# Altium PCB C8T6_V2.0.PcbDoc
Units mil, origin at the board's own origin, x right, y up, seen from the top; angles counter-clockwise.
Board outline 2203.03 x 1475 mil, 2 copper layers (Top Layer, Bottom Layer); 36 components, 53 nets, 188 pads, 139 vias.
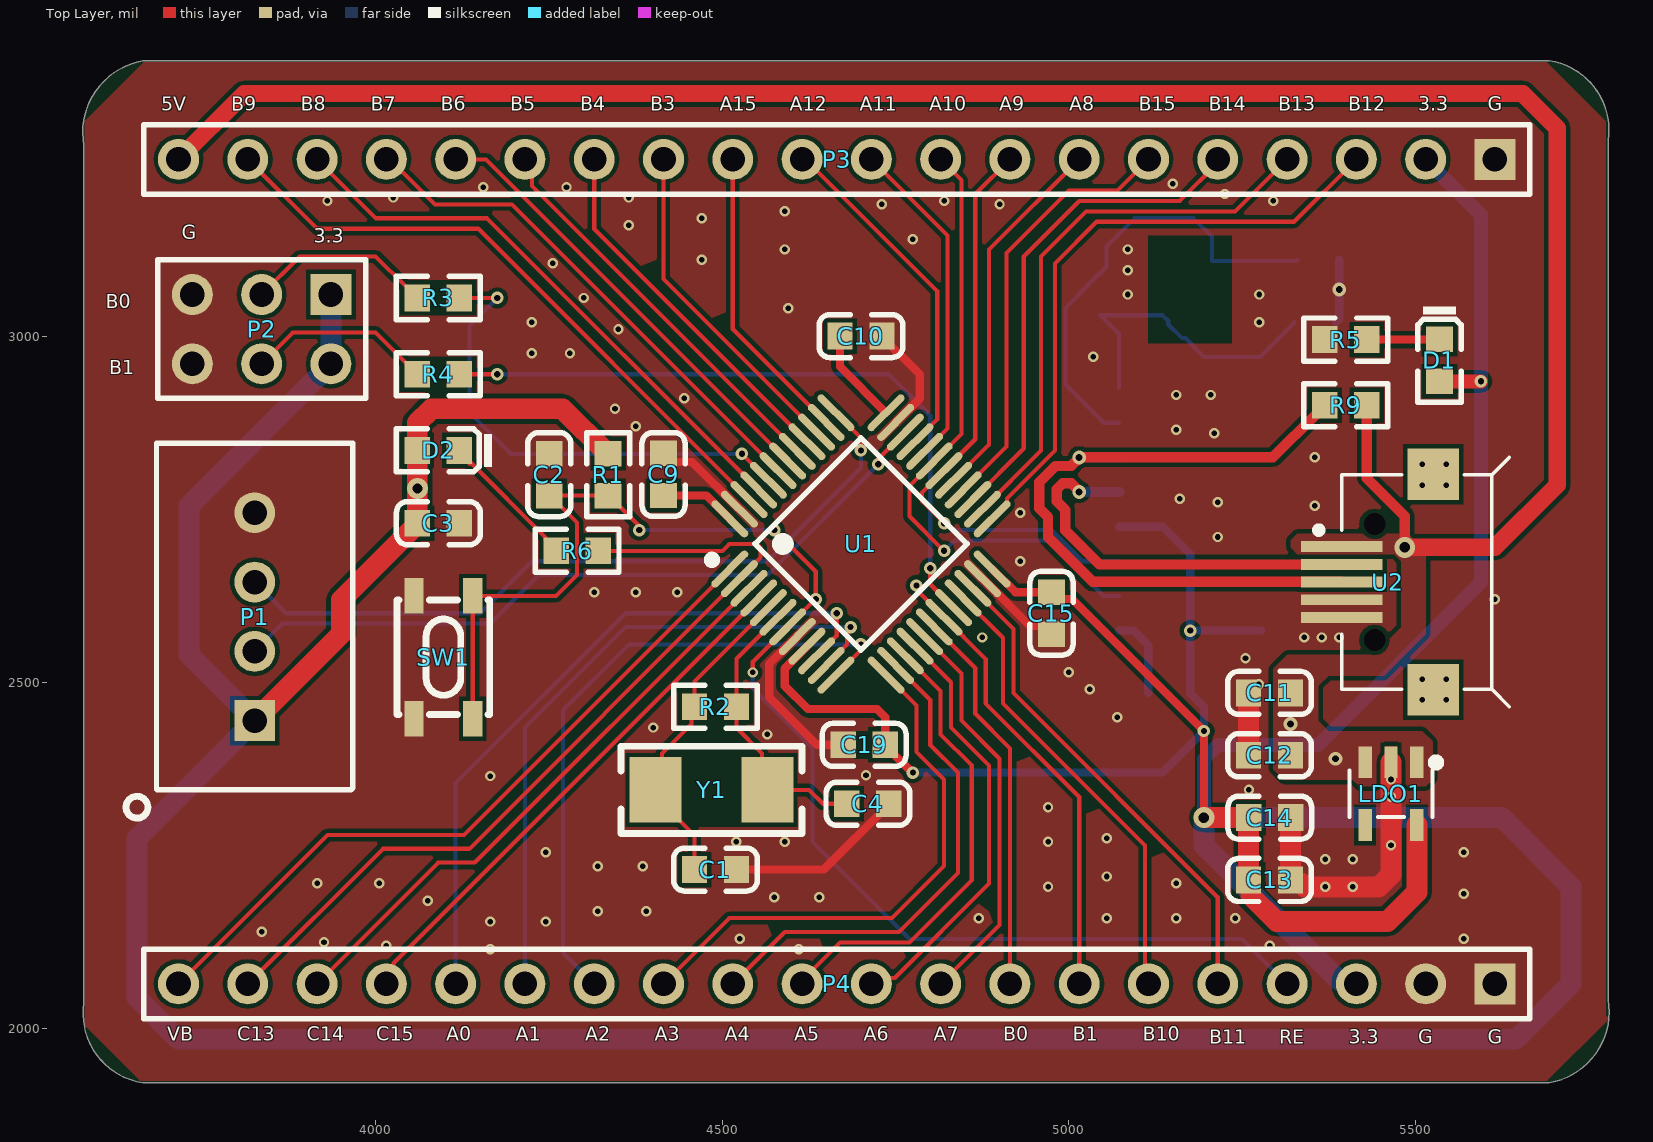
[diagram p0: Top Layer view]
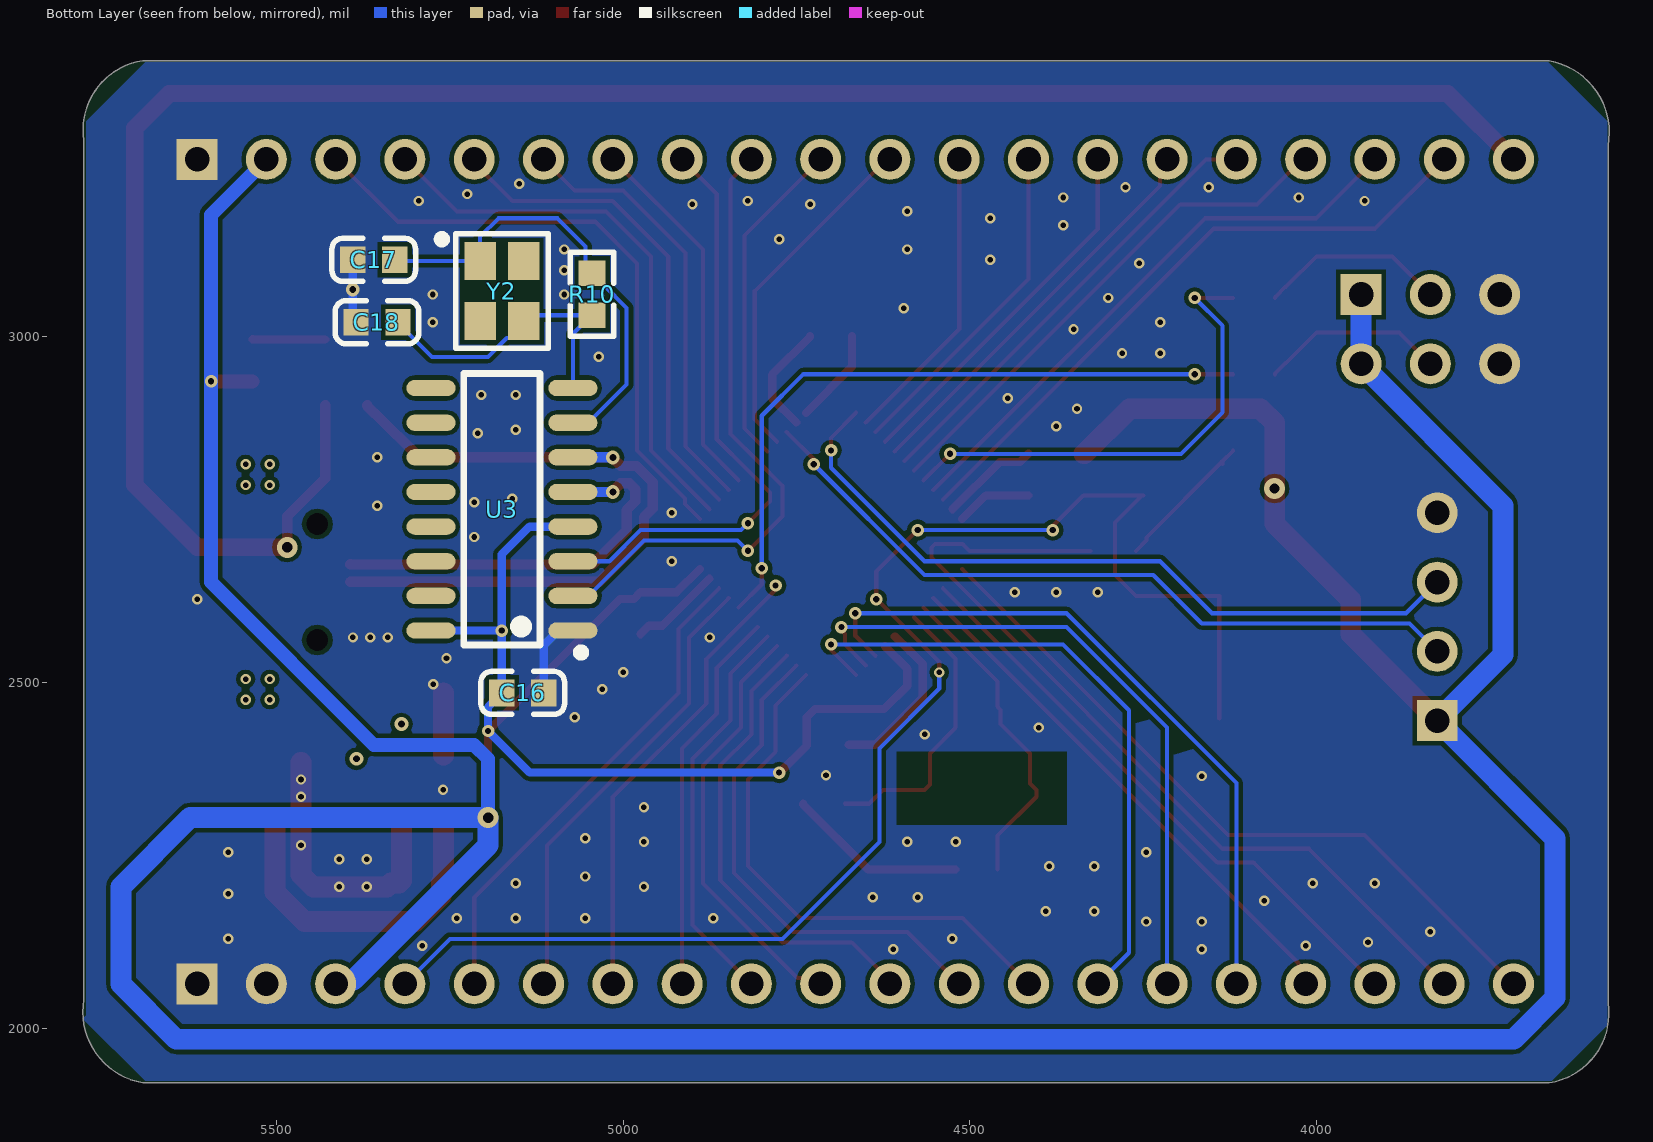
[diagram p1: Bottom Layer view, seen from below]
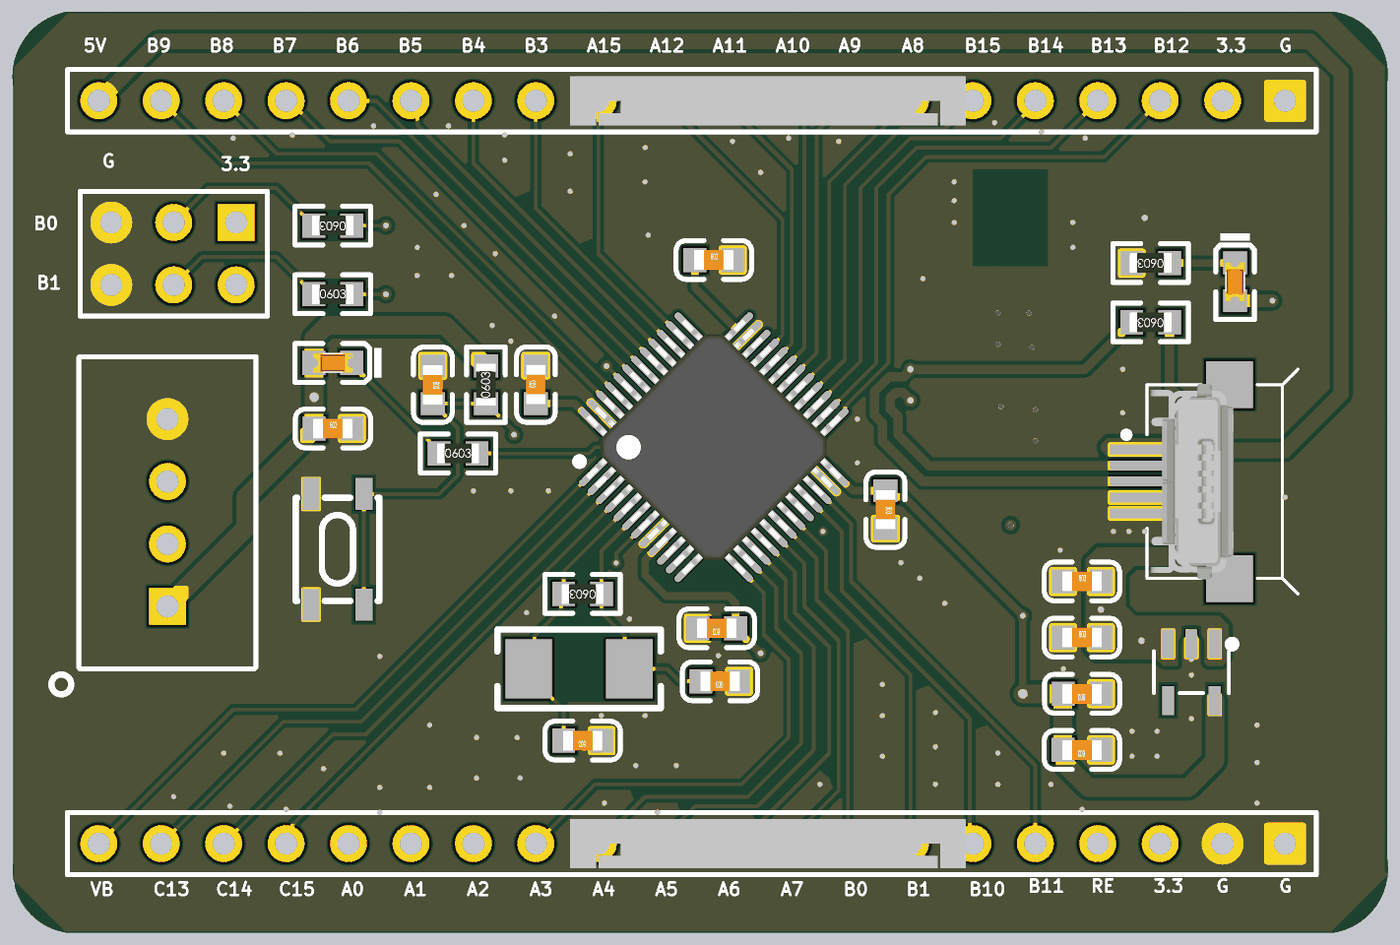
[diagram p2: 3D render of the assembled board from above, using the file's embedded part models]
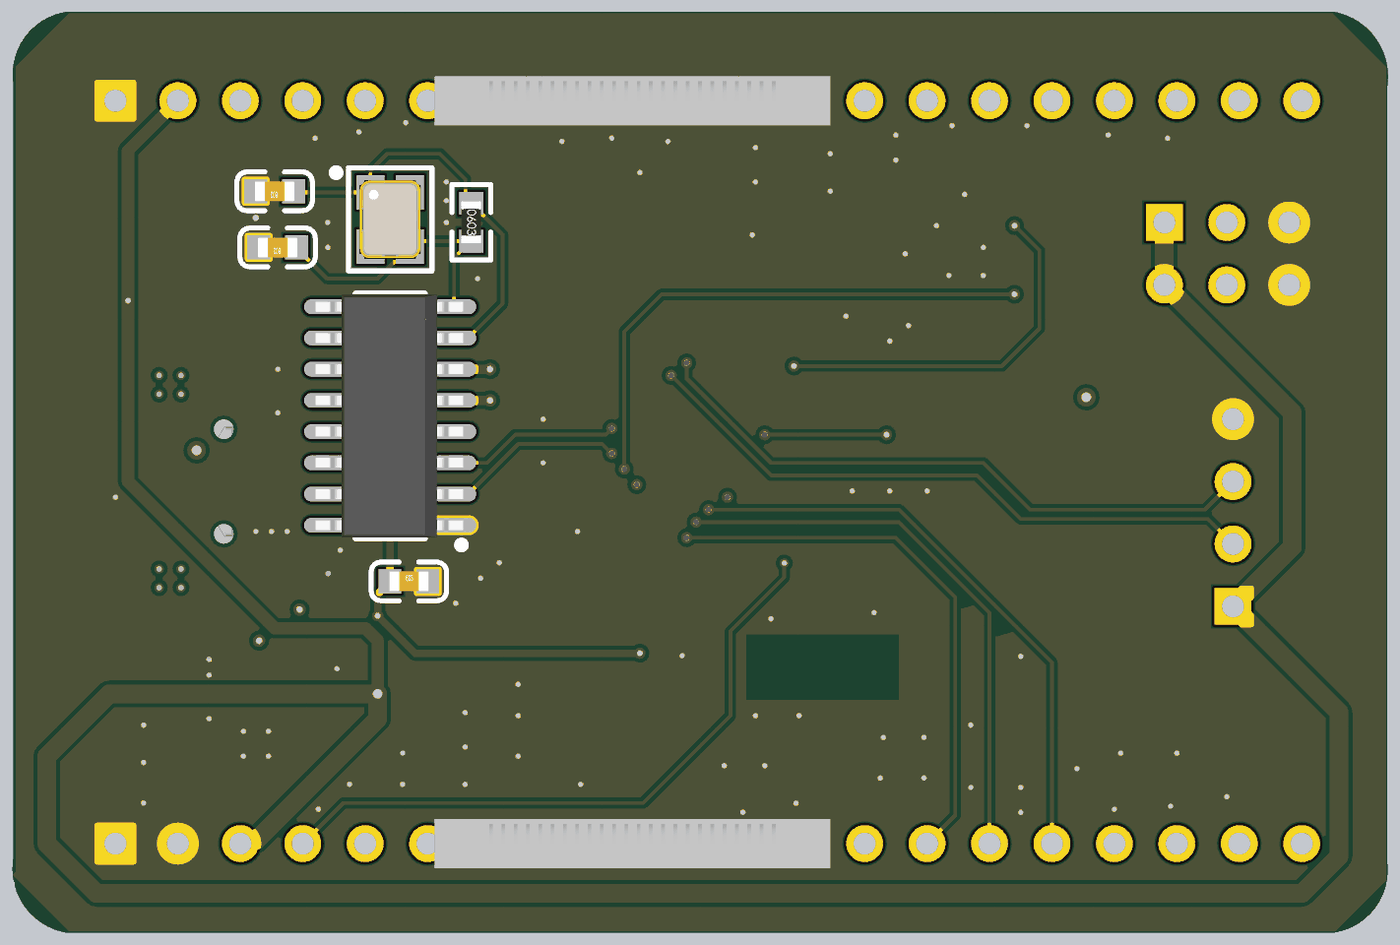
[diagram p3: 3D render of the assembled board from below, using the file's embedded part models]

## Layer stack, top to bottom
Top Solder: solder mask 0.4, Solder Resist, Dk 3.5
Top Layer: signal copper 1.4
Dielectric 1: dielectric 12.6, FR-4, Dk 4.8
Bottom Layer: signal copper 1.4
Bottom Solder: solder mask 0.4, Solder Resist, Dk 3.5

## Board outline
3578.43,2037.38 ccw(c3678.43,2022.38) 3663.43,1922.38 5693.43,1922.38 ccw(c5675.93,2024.88) 5778.43,2042.38 5778.43,3282.38 ccw(c5678.43,3297.38) 5693.43,3397.38 3663.43,3397.38 ccw(c3682.17,3293.64) 3578.43,3274.9

## Design rules (kind name [scope] priority, off if disabled: settings)
Clearance [All] p1: gap=6 ignorepadtopadclearanceinfootprint=FALSE
DiffPairsRouting [All] p1: maxlimit=10 minlimit=10 mostfreqgap=10 toplayer_minwidth=15 toplayer_maxwidth=15 toplayer_prefwidth=15 bottomlayer_minwidth=15 bottomlayer_maxwidth=15 bottomlayer_prefwidth=15 maxuncoupledlength=500
PlaneClearance [All] p1: clearance=8
PlaneConnect [All] p1: planeconnectstyle=Direct reliefexpansion=20 reliefentries=4 reliefconductorwidth=10 reliefairgap=10
PolygonConnect [All] p1: connectstyle=Direct reliefconductorwidth=10 reliefentries=4 polygonreliefangle="90 Angle" airgapwidth=10
RoutingVias [All] p1: holewidth=10 width=20 viastyle="Through Hole" minholewidth=4 minwidth=4 maxholewidth=50 maxwidth=50
SilkToSolderMaskClearance [IsPad] p1: minsilkscreentomaskgap=2 clearancetoexposedcopper=TRUE
SolderMaskExpansion [All] p1: expansion=4 istentingtop=FALSE
Width [All] p1: maxlimit=40 minlimit=6 preferedwidth=6
26 further rules are at their usual default settings.

## Classes and differential pairs
differential pair USB: +USB_P -USB_N

## Components (designator, comment, footprint, x,y, rotation, side; value= is the part's Value field where it differs from the comment)
C1 "22pF /0603/50V" 0603_C 4490,2230 r180 top
C2 "100nF /0603/50V" 0603_C 4250,2800 r270 top
C3 "1uF/0603/50V" 0603_C 4090,2730 r0 top
C4 "22pF /0603/50V" 0603_C 4710,2325 r180 top
C9 "100nF /0603/50V" 0603_C 4415,2800.32 r90 top
C10 "100nF /0603/50V" 0603_C 4700,3000 r0 top
C11 "1uF /0603/50V" 0603_C 5289.68,2485 r0 top
C12 "100nF/0603/50V" 0603_C 5289.68,2395 r0 top
C13 "1uF /0603/50V" 0603_C 5289.69,2215 r180 top
C14 "100nF/0603/50V" 0603_C 5290,2305 r180 top
C15 "100nF /0603/50V" 0603_C 4975,2600 r270 top
C16 "100nF/0603/50V" 0603_C 5145,2485 r180 bottom
C17 "22pF /060350V" 0603_C 5360,3110 r0 bottom
C18 "22pF /060350V" 0603_C 5355.31,3020 r0 bottom
C19 "100nF /0603/50V" 0603_C 4704.69,2410 r180 top
D1 "红灯 0603" 0603_LED_S1 5535,2965 r270 top
D2 "红灯 0603" 0603_LED_S1 4089.77,2835 r180 top
LDO1 "ME6211C33M5G-N" SOT-23-5_L3.0-W1.7-P0.95-LS2.8-BL 5470,2340 r180 top
P1 "SWD" HDR4x1 3825,2445 r90 top
P2 "Header 3X2" HDR2X3 3935,3060 r180 top
P3 "Header 20" HDR1X20 5615,3255 r180 top
P4 "Header 20" HDR1X20 5615,2065 r180 top
R1 "10KΩ/0603/±1%" 0603_R 4335,2800 r90 top
R2 "1MΩ /0603/±1%" 0603_R 4490,2465 r180 top
R3 "10KΩ /0603/±1%" 0603_R 4089.77,3055 r180 top
R4 "10KΩ /0603/±1%" 0603_R 4089.77,2945 r0 top
R5 "1KΩ /0603/±1%" 0603_R 5399.68,2995 r180 top
R6 "1KΩ /0603/±1%" 0603_R 4290.31,2690 r0 top
R9 "4.7KΩ/0603/±1%" 0603_R 5399.69,2900 r180 top
R10 "1MΩ/0603/±1%" 0603_R 5045,3060.32 r270 bottom
SW1 "KEY_SMD_4P" "SW-SMD_4P-L4.2-W3.3-P2.15-LS5.1 - duplicate" 4139.65,2625 r270 top
U1 "STM32F103C8T6" LQFP-48_7x7x05P 4700,2700 r315 top
U2 "USB-mrico" Micro_USB 5460,2645 r90 top
U3 "CH340G" SOIC-16_150mil 5175,2750 r90 bottom
Y1 "8MHz ±20ppm 20pF" SMD-5032_2P 4484.29,2345 r180 top
Y2 "12MHZ 20PF 10PPM" SMD-3225_4P 5175,3065 r270 bottom

## Footprints (in the part's own frame and the unit in brackets; to place one, negate y for a bottom-side part, rotate by r counter-clockwise, add the part's x,y. Pads: shape width x height; smd on the part's side, far side on the other; paste and mask are expansions set on the pad)
0603_C [mm]
  rect 0.93x0.98 smd: 1(-0.77,0) 2(0.77,0)
  silkscreen extent -1.53,-0.79 1.54,0.79, body extent -0.8,-0.4 0.8,0.4, height 0.3
0603_LED_S1 [mm]
  rect 0.93x0.98 smd: A(0.77,0) K(-0.77,0)
  silkscreen extent -1.98,-0.79 1.54,0.79, body extent -0.8,-0.4 0.8,0.4, height 0.6
0603_R [mm]
  rect 0.93x0.98 smd: 1(-0.77,0) 2(0.77,0)
  silkscreen extent -1.53,-0.79 1.54,0.79, body extent -0.85,-0.4 0.85,0.4, height 0.56
HDR1X20 [mm] "Connector; Header; 20 Position"
  rect 1.5x1.5 hole 0.9: 1(0,0)
  round 1.5 hole 0.9: 2(2.54,0) 3(5.08,0) 4(7.62,0) 5(10.16,0) 6(12.7,0) 7(15.24,0) 8(17.78,0) 9(20.32,0) 10(22.86,0) 11(25.4,0) 12(27.94,0) 13(30.48,0) 14(33.02,0) 15(35.56,0) 16(38.1,0) 17(40.64,0) 18(43.18,0) 19(45.72,0) 20(48.26,0)
  silkscreen extent -1.27,-1.27 49.53,1.27, body extent 12.98,-1 29.08,1, height 2.85
HDR2X3 [mm] "Connector; Header; 3x2 Position"
  rect 1.5x1.5 hole 0.9: 1(0,0)
  round 1.5 hole 0.9: 2(0,2.54) 3(2.54,0) 4(2.54,2.54) 5(5.08,0) 6(5.08,2.54)
  silkscreen extent -1.27,-1.27 6.35,3.81
HDR4x1 [mm] "4X1排针"
  rect 1.5x1.5 hole 0.9: 1(0,0)
  round 1.5 hole 0.9: 2(2.54,0) 3(5.08,0) 4(7.62,0)
  silkscreen extent -3.58,-3.6 10.16,4.72
LQFP-48_7x7x05P [mm]
  oval 0.28x1.8 smd mask+0.051: 1(-2.75,-4.05) 2(-2.25,-4.05) 3(-1.75,-4.05) 4(-1.25,-4.05) 5(-0.75,-4.05) 6(-0.25,-4.05) 7(0.25,-4.05) 8(0.75,-4.05) 9(1.25,-4.05) 10(1.75,-4.05) 11(2.25,-4.05) 12(2.75,-4.05) 25(2.75,4.05) 26(2.25,4.05) 27(1.75,4.05) 28(1.25,4.05) 29(0.75,4.05) 30(0.25,4.05) 31(-0.25,4.05) 32(-0.75,4.05) 33(-1.25,4.05) 34(-1.75,4.05) 35(-2.25,4.05) 36(-2.75,4.05)
  oval 1.8x0.28 smd mask+0.051: 13(4.05,-2.75) 14(4.05,-2.25) 15(4.05,-1.75) 16(4.05,-1.25) 17(4.05,-0.75) 18(4.05,-0.25) 19(4.05,0.25) 20(4.05,0.75) 21(4.05,1.25) 22(4.05,1.75) 23(4.05,2.25) 24(4.05,2.75) 37(-4.05,2.75) 38(-4.05,2.25) 39(-4.05,1.75) 40(-4.05,1.25) 41(-4.05,0.75) 42(-4.05,0.25) 43(-4.05,-0.25) 44(-4.05,-0.75) 45(-4.05,-1.25) 46(-4.05,-1.75) 47(-4.05,-2.25) 48(-4.05,-2.75)
  silkscreen extent -3.6,-4.42 2.75,2.75, body extent -4.5,-4.5 4.5,4.5, height 1.6
Micro_USB [mm]
  rect 0.4x3 smd: 1(1.3,1.679) 2(0.65,1.679) 3(0,1.679) 4(-0.65,1.679) 5(-1.3,1.679)
  round 0 hole 0.8 unplated: MH1(2.127,0.471) MH2(-2.127,0.471)
  rect 1.9x1.9 smd: ""(-3.95,-1.679) ""(3.95,-1.679)
  silkscreen extent -4.57,-4.46 4.57,2.64, body extent -3.97,-1.85 3.98,1.54, height 5.58
SMD-3225_4P [mm]
  rect 1.4x1.15 smd: 1(-1.1,-0.8) 2(1.1,-0.8) 3(1.1,0.8) 4(-1.1,0.8)
  silkscreen extent -2.1,-2.35 2.1,1.7, body extent -1.6,-1.25 1.6,1.25, height 0.61
SMD-5032_2P [mm]
  rect 1.9x2.4 smd: 1(-2.05,0) 2(2.05,0)
  silkscreen extent -3.32,-1.6 3.32,1.6
SOIC-16_150mil [mm]
  oval 0.6x1.8 smd: 1(-4.445,-2.6) 2(-3.175,-2.6) 3(-1.905,-2.6) 4(-0.635,-2.6) 5(0.635,-2.6) 6(1.905,-2.6) 7(3.175,-2.6) 8(4.445,-2.6) 9(4.445,2.6) 10(3.175,2.6) 11(1.905,2.6) 12(0.635,2.6) 13(-0.635,2.6) 14(-1.905,2.6) 15(-3.175,2.6) 16(-4.445,2.6)
  silkscreen extent -5.4,-3.05 4.97,1.4, body extent -4.95,-2.97 4.95,3.03, height 1.75
SOT-23-5_L3.0-W1.7-P0.95-LS2.8-BL [mm]
  rect 0.49x1.157 smd paste+0 mask+0.051: 1(-0.823,-1.143) 2(0.127,-1.143) 3(1.077,-1.143)
  rect 0.49x1.175 smd paste+0 mask+0.051: 4(1.077,1.164) 5(-0.823,1.164)
  silkscreen extent -1.67,-1.28 1.65,0.86
"SW-SMD_4P-L4.2-W3.3-P2.15-LS5.1 - duplicate" [mm]
  rect 1.3x0.7 smd paste+0 mask+0.051: 1(0,0) 2(4.5,0) 3(0,-2.15) 4(4.5,-2.15)
  silkscreen extent 0.15,-2.78 4.35,0.63

## Part data
C1 C4 C17 C18: library part "0603 22pF (220) 5% 50V", "贴片电容", Package=0603, SuppliersPartNumber=C1653, ComponentLink1Description=供应商链接, ComponentLink1URL=http://www.szlcsc.com/product/details_2005.html, Supplier=LC
C2 C9 C10 C12 C14 C15 C16 C19: library part "0603 100nF (104) 10% 50V", "贴片电容", Package=0603, SuppliersPartNumber=C14663, ComponentLink1Description=供应商链接, ComponentLink1URL=http://www.szlcsc.com/product/details_15331.html, Supplier=LC
C3 C11 C13: library part "0603 1uF (105) 10% 50V", "贴片电容", Package=0603, SuppliersPartNumber=C15849, ComponentLink1Description=供应商链接, ComponentLink1URL=http://www.szlcsc.com/product/details_16531.html, Supplier=LC
D1 D2: library part "0603 红灯", "发光二极管", Package=0603, SuppliersPartNumber=C2286, ComponentLink1Description=供应商链接, ComponentLink1URL=http://www.szlcsc.com/product/details_2659.html, Supplier=LC
LDO1: Current - Supply (Max)=60μA, JLCPCB Part Class="Extended Part", Manufacturer=MICRONE(南京微盟), Operating Temperature=-40℃~150℃, Output Current (Max)=500mA, Quiescent Current (Iq)=-, Voltage - Input (Max)=6V, Voltage - Output (Fixed)=3.3V, Voltage Dropout (Max)="260mV @ 200mA(typ)", Add into BOM=yes, Convert to PCB=yes, Datasheet=https://atta.szlcsc.com/upload/public/pdf/source/20170918/C82942_1505727073070976520.pdf, Device=ME6211C33M5G-N, Enabling feet=-, LCSC Part Name=ME6211C33M5G-N, Manufacturer Part=ME6211C33M5G-N, Name=ME6211C33M5G-N, Number of Output Channels=1, Output Configuration=正, Output Type=固定, Ripple Rejection (PSRR)="70dB ~ 62dB(1kHz ~ 10kHz)", Supplier=LCSC, Supplier Footprint=SOT-23-5, Supplier Part=C82942, Symbol=ME6211C33M5G-N, Voltage - Output (adj)=-
P2: "Header, 3-Pin, Dual row", LatestRevisionDate=17-Jul-2002, LatestRevisionNote="Re-released for DXP Platform.", Publisher="Altium Limited"
P3 P4: "Header, 20-Pin", LatestRevisionDate=17-Jul-2002, LatestRevisionNote="Re-released for DXP Platform.", Publisher="Altium Limited"
R1 R3 R4 R5 R6: library part "0603 10KΩ (1002) 1%_1", "贴片电阻", Package=0603, SuppliersPartNumber=C25804, ComponentLink1Description=供应商链接, ComponentLink1URL=http://www.szlcsc.com/product/details_26547.html, Supplier=LC
R2 R10: library part "0603 1MΩ (1004) 1%", "贴片电阻", Package=0603, SuppliersPartNumber=C22935, ComponentLink1Description=供应商链接, ComponentLink1URL=http://www.szlcsc.com/product/details_23662.html, Supplier=LC
R9: library part "0603 4.7KΩ (4701) 1%", "贴片电阻", Package=0603, SuppliersPartNumber=C23162, ComponentLink1Description=供应商链接, ComponentLink1URL=http://www.szlcsc.com/product/details_23889.html, Supplier=LC
U1: "ARM", Package=LQFP-48_7x7x05P, SuppliersPartNumber=C8734, ComponentLink1Description=供应商链接, ComponentLink1URL=http://www.szlcsc.com/product/details_9243.html, Supplier=LC
U2: library part usb-STM
U3: library part CH340G_[C14267], "USB", Package=SOIC-16_150mil, SuppliersPartNumber=C14267, ComponentLink1Description=供应商链接, ComponentLink1URL=http://www.szlcsc.com/product/details_14927.html, Supplier=LC
Y1: library part "SMD-5032_2P 8MHz 20ppm 20pF", "贴片晶振", Package=SMD-5032_2P, SuppliersPartNumber=C115962, ComponentLink1Description=供应商链接, ComponentLink1URL=http://www.szlcsc.com/product/details_117214.html, Supplier=LC
Y2: library part "SMD-3225_4P  12MHZ 20PF 10PPM", "贴片晶振", Package=SMD-3225_4P, SuppliersPartNumber=C9002, ComponentLink1Description=供应商链接, ComponentLink1URL=http://www.szlcsc.com/product/details_9522.html, Supplier=LC

## Via types
v1: diameter 15, hole 8, Top Layer to Bottom Layer, tented both sides, 112 vias
v2: diameter 18, hole 9, Top Layer to Bottom Layer, tented both sides, 19 vias
v3: diameter 20, hole 10, Top Layer to Bottom Layer, tented both sides, 5 vias
v4: diameter 30, hole 15, Top Layer to Bottom Layer, tented both sides, 3 vias

## Nets (pads, with @x,y where several pads share a name; then routed paths per layer and width w, separated by ;. In a path a pad name is that pad's centre, name@x,y a point inside that pad or via, vN(x,y) a via of type N, cw(c..) or ccw(c..) an arc to the next point about the centre after c; other vN are vias at no path point)
5V: C11.2 C12.2 LDO1.1 LDO1.3 P3.20 R9.1 U2.1 | length 3050.1
  Top Layer w15: R9.1 5430,2795 5485,2740 v4(5485,2695)
  Top Layer w25: P3.20 3810,3350 5655,3350 5705,3300 5705,2785 5615,2695 v4(5485,2695)
  other v3: 5385,2390 5320,2440
BOOT0: R3.1 U1.44 | length 711.7
  Top Layer w6: R3.1 v2(4175,3055) ; v2@4525,2830 v2(4528.24,2830) U1.44
  Bottom Layer w6: v2(4175,3055) 4135,3015 4135,2890 4195,2830 v2(4528.24,2830)
BOOT1: R4.2 U1.20 | length 995.6
  Top Layer w6: R4.2 v2(4175,2945) ; v2(4800,2665) 4800,2641.76 U1.20
  Bottom Layer w6: v2(4175,2945) 4740,2945 4800,2885 v2(4800,2665)
GND: C1.1 C2.1 C3.2 C4.1 C9.2 C10.2 C11.1 C12.1 C13.1 C14.1 C15.2 C16.2 C17.2 C18.2 C19.2 LDO1.2 P1.4 P2.5 P2.6 P3.1 P4.1 P4.2 R5.2 SW1.3 SW1.4 U1.8 U1.23 U1.35 U1.47 U2.4 U2.5 U3.1 | length 1648.3
  Top Layer w12: C9.2 4427.31,2818.32 4456.4,2818.32 U1.47 ; C1.1 4646.3,2230 4740.31,2324.02 C4.1 ; U1.8 4607.44,2566.37 4586.28,2545.22 4586.06,2545.22 4567.43,2526.58 4567.43,2479.38 4636.81,2410 C19.2 ; C10.2 4730.31,2999.02 4785,2944.33 4785,2910.28 U1.35 ; U1.23 4943.28,2581.99 4962.69,2581.99 C15.2
  Top Layer w30: C12.1 C11.1 ; C14.1@5320,2305 5320,2214.02 5323.31,2210.71 5335.17,2210.71 5340.88,2205 5447.43,2205 5465,2222.57 LDO1.2
  Bottom Layer w12: U3.1 5093.11,2575 5114.69,2553.43 C16.2 ; C18.2 5390.31,3024.68 C17.2
  other v1: 4165,2115 4610,2115 4015,2120 5290,2120 3925,2125 4525,2130 5570,2130 3835,2140 4165,2155 4245,2155 4870,2160 5055,2160 5155,2160 5240,2160 4320,2170 4390,2170 4075,2185 4575,2190 4640,2190 5570,2195 4970,2205 5370,2205 5410,2205 3915,2210 4005,2210 5155,2210 5055,2220 4320,2235 4385,2235 5370,2245 5410,2245 4245,2255 5570,2255 5465,2265 4520,2270 4590,2270 4970,2270 5055,2275 4970,2320 5465,2335 5260,2345 5465,2360 4165,2365 4707.29,2366.01 4565,2425 4400,2435 5070,2450 5030,2490 5274.22,2497.71 5000,2515 5255,2535 4875,2565 5340,2565 5365,2565 5390,2565 5615,2620 4315,2630 4375,2630 4435,2630 4930,2675 5215,2710 4930,2745 5355,2755 5215,2760 5160,2765 5355,2825 5210,2860 5155,2865 4375,2870 4345,2895 4445,2910 5155,2915 5205,2915 5035,2970 4225,2975 4280,2975 4350,3010 4225,3020 5275,3020 4595,3040 4300,3055 5085,3060 5275,3060 5085,3095 4255,3105 4470,3110 4590,3125 5085,3125 4775,3140 4365,3160 4470,3170 4590,3180 4730,3190 4900,3190 3930,3195 4820,3195 5295,3195 4025,3200 4365,3200 5225,3205 4155,3215 4275,3215 5150,3220
  other v3: 5390.31,3067.34
NetC9_1: C9.1 U1.48 | length 109.7
  Top Layer w12: C9.1 4476.89,2770 U1.48
NetC10_1: C10.1 U1.36 | length 138.2
  Top Layer w12: C10.1 4669.69,2955.81 U1.36
NetC17_1: C17.1 R10.1 U3.7 Y2.1 | length 665
  Bottom Layer w6: R10.1 5054.42,3100.05 5054.42,3129.42 5095,3170 5180,3170 5206.5,3143.5 Y2.1 5327.99,3108.31 C17.1 ; R10.1@5045.98,3090.63 5044.02,3090.63 5028.71,3075.32 5028.71,3074.34 4995,3040.63 4995,2930 5050,2875 U3.7
NetC18_1: C18.1 R10.2 U3.8 Y2.3 | length 445.1
  Bottom Layer w6: R10.2 R10.2@5045.98,3030 ; U3.8 5072.64,3003.35 R10.2@5045.98,3030 ; C18.1 5325,3019.02 5275.98,2970 5195.2,2970 5168.06,2997.13 5163.14,2997.13 5143.5,3016.77 Y2.3 5135.2,3030 R10.2@5045.98,3030
NetD1_K: D1.K R5.1 | length 105.1
  Top Layer w12: R5.1 5534.69,2995 D1.K
NetD2_K: D2.K R6.1 | length 207.4
  Top Layer w6: D2.K 4120.08,2834.02 D2.K@4135.39,2818.71 ; 4135.39,2815.28 D2.K@4135.39,2818.71 ; D2.K@4135.39,2819.69 D2.K@4135.39,2818.71 ; R6.1 4244.69,2705.31 4244.69,2709.4 D2.K@4135.39,2818.71
NetP2_3: P2.3 R3.2 | length 272.7
  Top Layer w6: P2.3 3890,3115 3999.45,3115 4043.16,3071.29 4044.14,3071.29 4059.45,3055.98 R3.2
NetP2_4: P2.4 R4.1 | length 268.5
  Top Layer w6: P2.4 3880,3005 3999.45,3005 4043.16,2961.29 4044.14,2961.29 4059.45,2945.98 R4.1
OSC_IN: C1.2 R2.2 U1.5 Y1.2 | length 468.8
  Top Layer w6: C1.2 4459.69,2279.06 4403.58,2335.16 Y1.2 4412.73,2354.15 4412.73,2397.73 4455.22,2440.22 4455.22,2460.54 R2.2 4459.68,2501.44 U1.5
OSC_OUT: C4.2 R2.1 U1.6 Y1.1 | length 415.5
  Top Layer w6: U1.6 4520.31,2534.23 R2.1 4520.31,2434.69 4557.27,2397.73 4557.27,2352.73 Y1.1 4625,2345 4645,2325 C4.2
PA0: P4.16 U1.10 | length 1015
  Top Layer w6: U1.10 4665,2567.56 v2(4665,2600)
  Bottom Layer w6: P4.16 4115,2355 4360,2600 v2(4665,2600)
PA1: P4.15 U1.11 | length 970
  Top Layer w6: U1.11 4680,2554.73 4680,2570 4685,2575 v2(4685,2580)
  Bottom Layer w6: P4.15 4215,2435 4360,2580 v2(4685,2580)
PA2: P4.14 U1.12 | length 942.3
  Top Layer w6: U1.12 4700,2546.89 v2(4700,2555)
  Bottom Layer w6: P4.14 4270,2110 4270,2460 4365,2555 v2(4700,2555)
PA3: P4.13 U1.13 | length 785.8
  Top Layer w6: P4.13 4510,2160 4745,2160 4820,2235 4820,2360 4780,2400 4780,2466.89 U1.13
PA4: P4.12 U1.14 | length 728.1
  Top Layer w6: P4.12 4590,2140 4755,2140 4840,2225 4840,2370 4800,2410 4800,2474.73 U1.14
PA5: P4.11 U1.15 | length 673.3
  Top Layer w6: P4.11 4615,2070 4670,2125 4770,2125 4860,2215 4860,2380 4815,2425 4815,2487.56 U1.15
PA6: P4.10 U1.16 | length 616.9
  Top Layer w6: P4.10 4723.74,2073.74 4748.74,2073.74 4885,2210 4885,2380 4830,2435 4830,2500.4 U1.16
PA7: P4.9 U1.17 | length 581.4
  Top Layer w6: U1.17 4845,2513.24 4845,2445 4900,2390 4900,2150 P4.9
PA8: P3.7 U1.29 | length 538.3
  Top Layer w6: U1.29 4885,2843.24 4885,3125 P3.7
PA9: P3.8 U1.30 U3.3 | length 866
  Top Layer w6: v2(4820,2730) 4788.29,2761.71 4788.29,2774.37 U1.30 4865,2851.08 4865,3205 P3.8
  Bottom Layer w6: v2(4820,2730) 4830,2720 4975,2720 5020,2675 U3.3
PA10: P3.9 U1.31 U3.2 | length 921.2
  Top Layer w6: P3.9 4845,3225 4845,2858.92 U1.31 4770,2783.92 4770,2740 v2(4820,2690)
  Bottom Layer w6: v2(4820,2690) 4835,2705 4970,2705 5050,2625 U3.2
PA11: P3.10 U1.32 | length 480.7
  Top Layer w6: P3.10 4825,3145 4825,2866.76 U1.32
PA12: P3.11 U1.33 | length 504.4
  Top Layer w6: P3.11 4620,3255 4810,3065 4810,2879.6 U1.33
PA15: P3.12 U1.38 | length 435.5
  Top Layer w6: P3.12 4515,3010.27 U1.38
PB0: P4.8 U1.18 | length 560.5
  Top Layer w6: U1.18 4865,2521.08 4865,2455 4915,2405 P4.8
PB1: P4.7 U1.19 | length 672.3
  Top Layer w6: v2(4780,2640) 4780,2633.92 U1.19 4880,2533.92 4880,2470 5015,2335 P4.7
PB3: P3.13 U1.39 | length 485.1
  Top Layer w6: P3.13 4415,3082.44 U1.39
PB4: P3.14 U1.40 | length 534.6
  Top Layer w6: P3.14 4315,3154.6 U1.40
PB5: P3.15 U1.41 | length 584.2
  Top Layer w6: P3.15 4225.15,3244.85 4225.15,3216.61 U1.41
PB6: P3.16 U1.42 | length 659.5
  Top Layer w6: P3.16 4158.92,3255 U1.42
PB7: P3.17 U1.43 | length 751.4
  Top Layer w6: P3.17 4020,3255 4085,3190 4196.08,3190 U1.43
PB8: P3.18 U1.45 | length 835.1
  Top Layer w6: P3.18 4000,3170 4160.4,3170 U1.45
PB9: P3.19 U1.46 | length 926.9
  Top Layer w6: P3.19 3915,3155 4147.56,3155 U1.46
PB10: P4.6 U1.21 | length 667.8
  Top Layer w6: U1.21 4905,2564.6 4905,2470 5110,2265 5110,2070 P4.6
PB11: P4.5 U1.22 | length 717.4
  Top Layer w6: U1.22 4920,2577.44 4920,2485 5215,2190 P4.5
PB12: P3.3 U1.25 | length 903.5
  Top Layer w6: U1.25 4910.67,2757.55 4910.67,2765.67 4980,2835 4980,3105 5040,3165 5325,3165 P3.3
PB13: P3.4 U1.26 | length 812.9
  Top Layer w6: U1.26 4960,2834.72 4960,3115 5025,3180 5240,3180 P3.4
PB14: P3.5 U1.27 | length 722.3
  Top Layer w6: U1.27 4935,2837.56 4935,3115 5015,3195 5160,3195 5215,3250 P3.5
PB15: P3.6 U1.28 | length 628.8
  Top Layer w6: U1.28 4910,2840.4 4910,3120 5000,3210 5070,3210 P3.6
PC13: P4.19 R6.2 U1.2 | length 1245.5
  Top Layer w6: P4.19 4010,2260 4134.73,2260 U1.2 4555,2680.27 4555,2695 4550,2700 4510,2700 4500,2690 R6.2@4325.32,2690
PC14: P4.18 U1.3 | length 860
  Top Layer w6: P4.18 4090,2240 4142.56,2240 U1.3
PC15: P4.17 U1.4 | length 779.7
  Top Layer w6: P4.17 4025.15,2075.15 4025.15,2094.75 U1.4
RESET: C2.2 P4.4 R1.1 SW1.1 SW1.2 U1.7 | length 2139.2
  Top Layer w6: SW1.2 SW1.1 4260,2625 4290,2655 4290,2730.67 C2.2@4250.98,2769.68 ; C2.2@4249.02,2769.68 C2.2 C2.2@4250.98,2769.68 ; v2(4380,2720) 4380,2725.67 4335.98,2769.69 C2.2@4250.98,2769.68 ; v1(4543.78,2514.49) 4543.78,2529.86 U1.7 4633.92,2620 v2(4634.73,2620) 4634.73,2660.27 v2(4575,2720)
  Bottom Layer w6: v2(4380,2720) v2(4575,2720) ; v1(4543.78,2514.49) 4543.78,2491.22 4630,2405 4630,2270 4770,2130 5250,2130 P4.4
SWDCLK: P1.3 U1.37 | length 1074.9
  Top Layer w6: U1.37 4700,2853.11 v2(4700,2835)
  Bottom Layer w6: P1.3 3870,2600 4150,2600 4225,2675 4565,2675 4700,2810 v2(4700,2835)
SWDIO: P1.2 U1.34 | length 1074.5
  Top Layer w6: v2(4725,2815) 4725,2822.44 U1.34
  Bottom Layer w6: P1.2 3865,2585 4165,2585 4235,2655 4565,2655 v2(4725,2815)
USB_N: R9.2 U2.3 U3.6 | length 1052
  Top Layer w15: R9.2 5369.37,2899.02 5358.56,2888.21 5357.58,2888.21 5294.37,2825 v3(5015,2825) 5015,2823.79 5003.71,2812.5 4980.93,2812.5 4957.5,2789.07 4957.5,2751.18 4970,2738.68 4970,2709.64 4977.32,2702.32 5034.35,2645.3 5393.6,2645.3 U2.3
  Bottom Layer w15: v3(5015,2825) U3.6
USB_P: U2.2 U3.5 | length 583.2
  Top Layer w15: v3(5015,2775) 5015,2776.21 5003.71,2787.5 4991.29,2787.5 4982.5,2778.71 4982.5,2761.54 4995,2749.04 4995,2720 5044.7,2670.3 5393.6,2670.3 U2.2
  Bottom Layer w15: v3(5015,2775) U3.5
VBAT: P4.20 U1.1 | length 1043.7
  Top Layer w6: P4.20 3930,2280 4126.89,2280 U1.1
VCC3V3: C3.1 C13.2 C14.2 C15.1 C16.1 C19.1 D1.A D2.A LDO1.5 P1.1 P2.1 P2.2 P3.2 P4.3 R1.2 U1.9 U1.24 U3.4 U3.16 | length 8859.6
  Top Layer w12: U1.9 4622.05,2552.05 4590,2520 4590,2495 4623.35,2461.65 4723.35,2461.65 4735,2450 4735,2409.02 4774.02,2370 v2(4775,2370) ; U1.24 4922.8,2630.32 C15.1 4984.68,2620.63 5004.37,2620.63 v2(5195,2430) v4(5195,2305) ; v2@5594.68,2934.68 v2(5594.84,2934.84)
  Top Layer w20: D1.A v2@5594.68,2934.68
  Top Layer w30: P1.1 3950,2570 3950,2619.33 4059.68,2729.02 C3.1 4059.57,2730.12 4059.57,2834.88 D2.A 4059.45,2874.45 4080,2895 4269.33,2895 4334.02,2830.32 R1.2 ; v4(5195,2305) C14.2@5259.37,2305 ; C14.2 C14.2@5259.37,2305 ; LDO1.5 5502.4,2197.4 5460,2155 5300,2155 5262.68,2192.32 5262.68,2211.69 C13.2 C14.2@5259.37,2305
  Bottom Layer w12: v2(4775,2370) 5135,2370 v2(5195,2430) 5195,2464.33 5187.62,2471.71 5175.31,2484.02 v2(5175.31,2575) ; U3.4 5135,2725 5175.31,2684.68 v2(5175.31,2575) ; U3.16 v2(5175.31,2575)
  Bottom Layer w20: v4(5195,2305) 5195,2390 5215,2410 5360,2410 5594.84,2644.84 v2(5594.84,2934.84) 5595,2935 5595,3175 P3.2
  Bottom Layer w30: P2.1 P2.2 3730,2755 3730,2540 P1.1 3655,2275 3655,2045 3715,1985 5645,1985 5725,2065 5725,2205 5625,2305 v4(5195,2305) 5195,2265 5389.44,2070.56 5409.44,2070.56 P4.3
  other v4: 4060,2780
pads on no net: LDO1.4 U2. U2.MH1 U2.MH2 U3.9 U3.10 U3.11 U3.12 U3.13 U3.14 U3.15 Y2.2 Y2.4
copper on no net:
  other v1: 5510,2475 5545,2475 5510,2505 5545,2505 5510,2785 5545,2785 5510,2815 5545,2815

## Polygon pours and split planes (outlines as drawn)
GND on Top Layer "GND_L01_P001" (solid, remove dead copper, pour order 1): 3665,3395 3580,3310 3580,2005 3660,1925 5690,1925 5780,2015 5775,2020 5775,3310 5690,3395
5V on Top Layer "5V_L01_P000" (solid, remove dead copper, pour order 0): 5420,2350 5410,2360 5310,2360 5295,2375 5295,2520 5315,2540 5440,2540 5480,2580 5480,2675 5470,2685 5330,2685 5320,2695 5320,2705 5330,2715 5490,2715 5515,2690 5515,2570 5455,2510 5375,2510 5360,2495 5360,2445 5375,2430 5510,2430 5525,2415 5525,2360 5515,2350 5490,2350 5480,2360 5480,2410 5475,2415 5455,2415 5450,2410 5450,2355 5445,2350
GND on Bottom Layer "GND_L02_P002" (solid, remove dead copper, pour order 2): 3665,3395 3580,3310 3580,2005 3660,1925 5690,1925 5780,2015 5775,2020 5775,3310 5690,3395

## Other copper
Top Layer:
  pour cut-out: 5026.55,2338.38 5023.88,2338.38 5021.68,2336.18 5022.5,2335.35 5022.5,2310 5047.5,2320
  pour cut-out: 5116.55,2273.38 5113.88,2273.38 5111.68,2271.18 5112.5,2270.35 5112.5,2245 5137.5,2255
  pour cut-out: 4926.55,2413.38 4923.88,2413.38 4921.68,2411.18 4922.5,2410.35 4922.5,2385 4947.5,2395
  pour cut-out: 4885,2170 4890.82,2153.8 4899.53,2177.05 4898.7,2177.87 4898.7,2203.23 4865,2185
  pour cut-out: 4788.38,2113.45 4788.38,2116.12 4786.18,2118.32 4785.35,2117.5 4760,2117.5 4770,2092.5
  pour cut-out: 4668.38,2128.45 4668.38,2131.12 4666.18,2133.32 4665.35,2132.5 4640,2132.5 4650,2107.5
  pour cut-out: 4593.38,2148.45 4593.38,2151.12 4591.18,2153.32 4590.35,2152.5 4565,2152.5 4575,2127.5
  pour cut-out: 4503.45,3006.62 4506.12,3006.62 4508.32,3008.82 4507.5,3009.65 4507.5,3035 4482.5,3025
  pour cut-out: 4400.95,3081.62 4403.62,3081.62 4405.82,3083.82 4405,3084.65 4405,3110 4380,3100
  pour cut-out: 4690,2430 4690,2390 4720,2390 4720,2430
  pour cut-out: 4083.76,2921.41 4095.78,2921.41 4095.78,2970.29 4083.76,2970.29
  pour cut-out: 4083.76,3080.29 4083.76,3029.71 4095.77,3029.71 4095.77,3080.29
  pour cut-out: 5115,3145 5115,2990 5235,2990 5235,3145
  pour cut-out: 4446.98,2385.27 4446.98,2304.73 4459.96,2291.76 4521.6,2291.76 4521.6,2385.27
Bottom Layer:
  pour cut-out: 4258.45,2441.62 4261.12,2441.62 4263.32,2443.82 4262.5,2444.65 4262.5,2470 4230,2450
  pour cut-out: 4203.45,2396.62 4206.12,2396.62 4208.32,2398.82 4207.5,2399.65 4207.5,2425 4175,2405
  pour cut-out: 5114.87,3141.87 5114.87,2988.13 5235.13,2988.13 5235.13,3141.87
  pour cut-out: 4360,2400 4360,2295 4605,2295 4605,2400

## Silkscreen, mask and mechanical layers (free items; w line width, h text height)
Top Overlay:
  text "5V" at 3690,3325 h20
  text "B9" at 3790.79,3325 h20
  text "B8" at 3891.58,3325 h20
  text "B7" at 3992.37,3325 h20
  text "B6" at 4093.16,3325 h20
  text "B5" at 4193.95,3325 h20
  text "B4" at 4294.74,3325 h20
  text "B3" at 4395.53,3325 h20
  text "A15" at 4496.32,3325 h20
  text "A12" at 4597.1,3325 h20
  text "A11" at 4697.89,3325 h20
  text "A10" at 4798.68,3325 h20
  text "A9" at 4899.47,3325 h20
  text "A8" at 5000.26,3325 h20
  text "B15" at 5101.05,3325 h20
  text "B14" at 5201.84,3325 h20
  text "B13" at 5302.63,3325 h20
  text "B12" at 5403.42,3325 h20
  text "3.3" at 5504.21,3325 h20
  text "G" at 5605,3325 h20
  text "G" at 3720,3140 h20
  text "3.3" at 3910,3135 h20
  text "B0" at 3610,3040 h20
  text "B1" at 3615,2945 h20
  text "VB" at 3699,1982.59 h20
  text "C13" at 3799.53,1982.59 h20
  text "C14" at 3900.05,1982.59 h20
  text "C15" at 4000.58,1982.59 h20
  text "A0" at 4101.11,1982.59 h20
  text "A1" at 4201.63,1982.59 h20
  text "A2" at 4302.16,1982.59 h20
  text "A3" at 4402.68,1982.59 h20
  text "A4" at 4503.21,1982.59 h20
  text "A5" at 4603.74,1982.59 h20
  text "A6" at 4704.26,1982.59 h20
  text "A7" at 4804.79,1982.59 h20
  text "B0" at 4905.32,1982.59 h20
  text "B1" at 5005.84,1982.59 h20
  text "B10" at 5106.37,1982.59 h20
  text "B11" at 5202.89,1978.59 h20
  text "RE" at 5303.42,1978.59 h20
  text "3.3" at 5403.95,1978.59 h20
  text "G" at 5504.47,1978.59 h20
  text "G" at 5605,1978.59 h20
Mechanical 1:
  the board outline again, w10